# Altium PCB Sensor_Box_CAN_Switch.PCBDOC
Units mil, origin at the board's own origin, x right, y up, seen from the top; angles counter-clockwise.
Board outline 1496.06 x 1407.48 mil, 2 copper layers (Top, Bot), stack 61.855 mil thick; 57 components, 46 nets, 208 pads, 53 vias.
Unrouted connection lines stored in the file: 1.
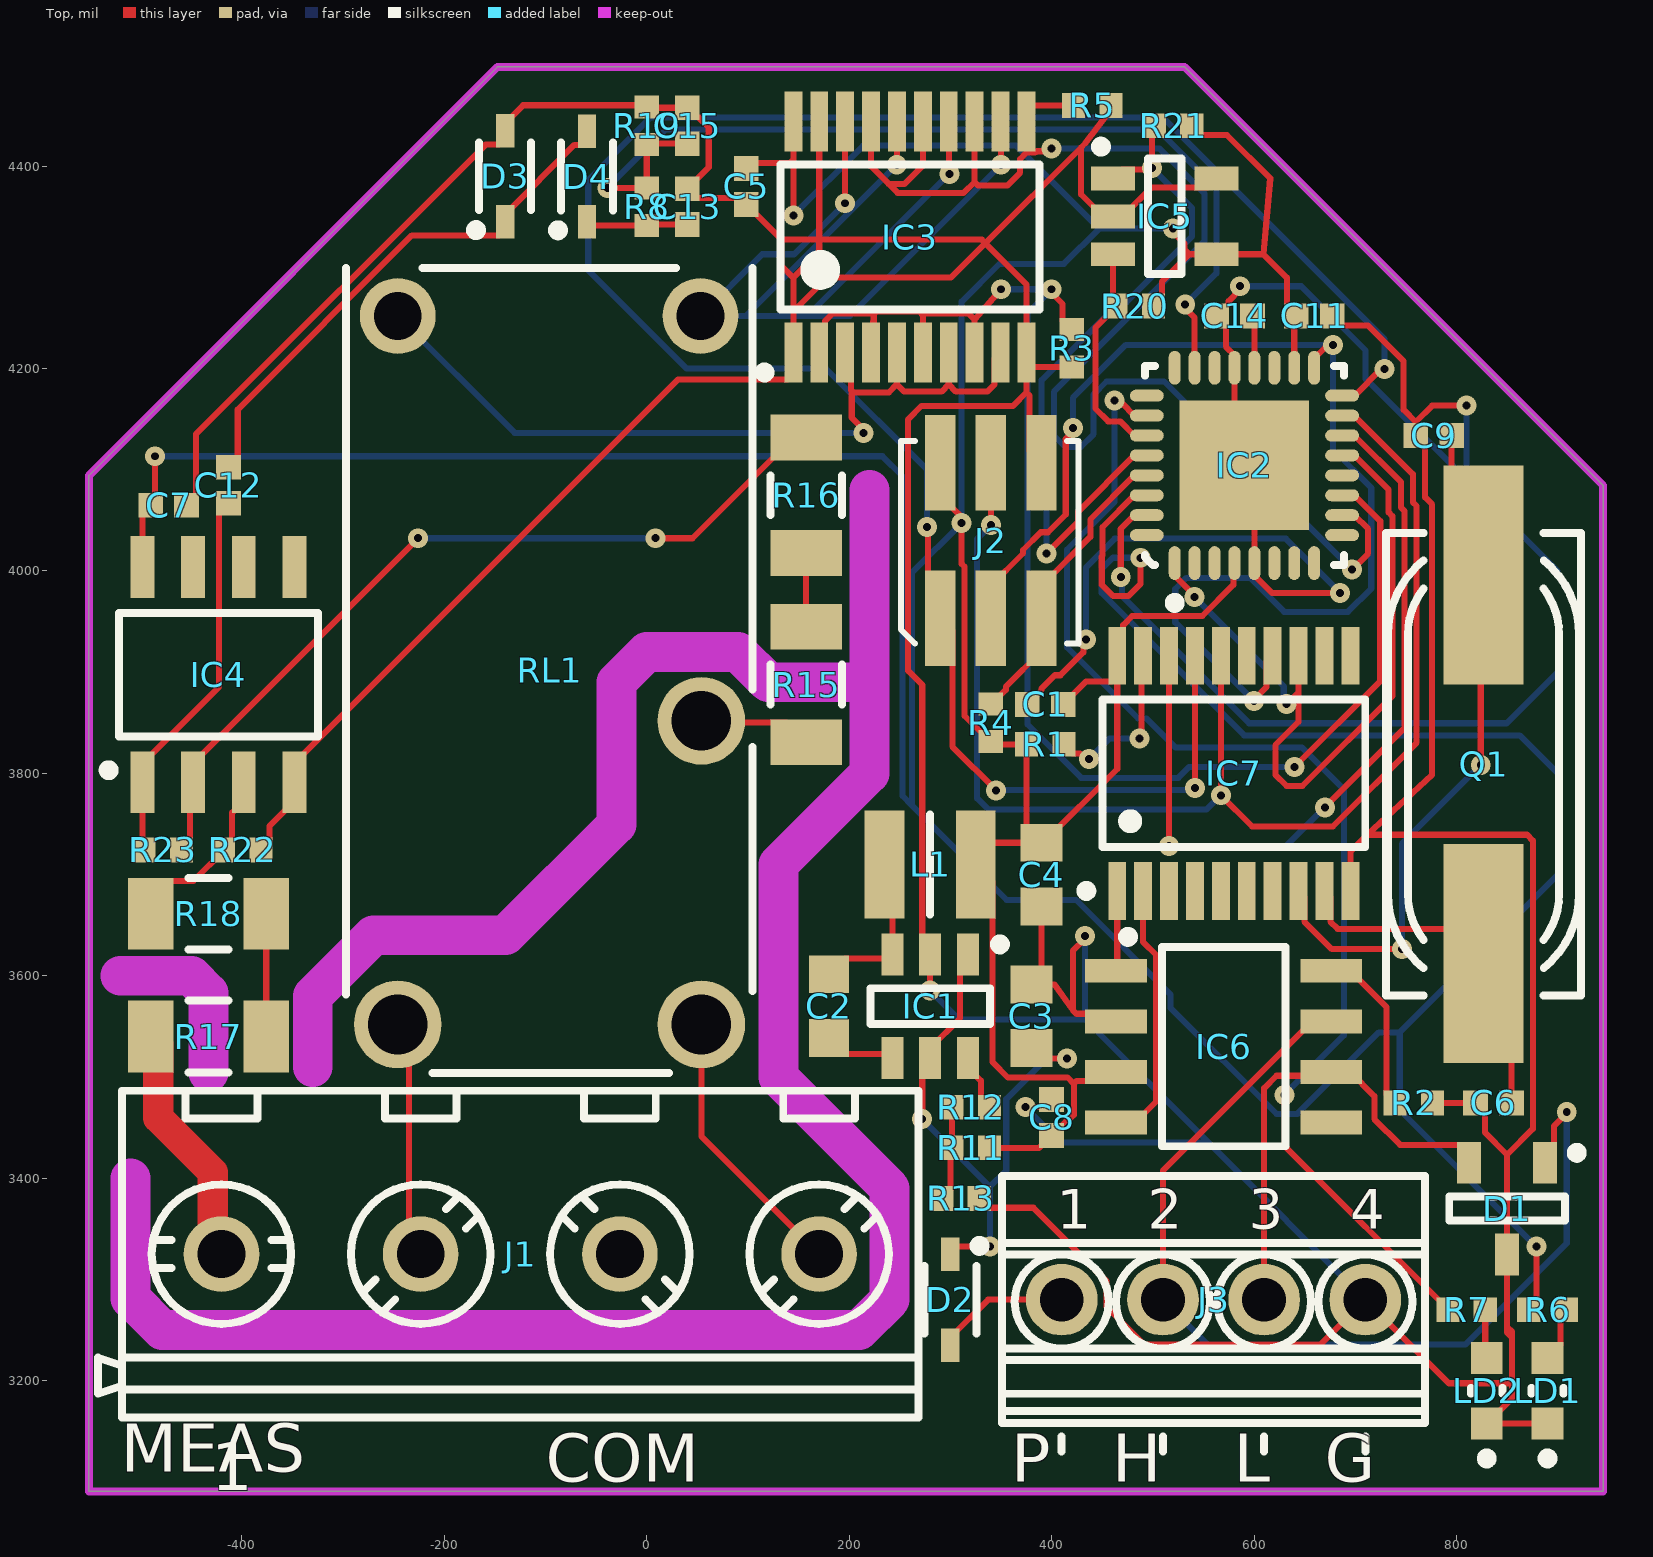
[diagram p0: Top view]
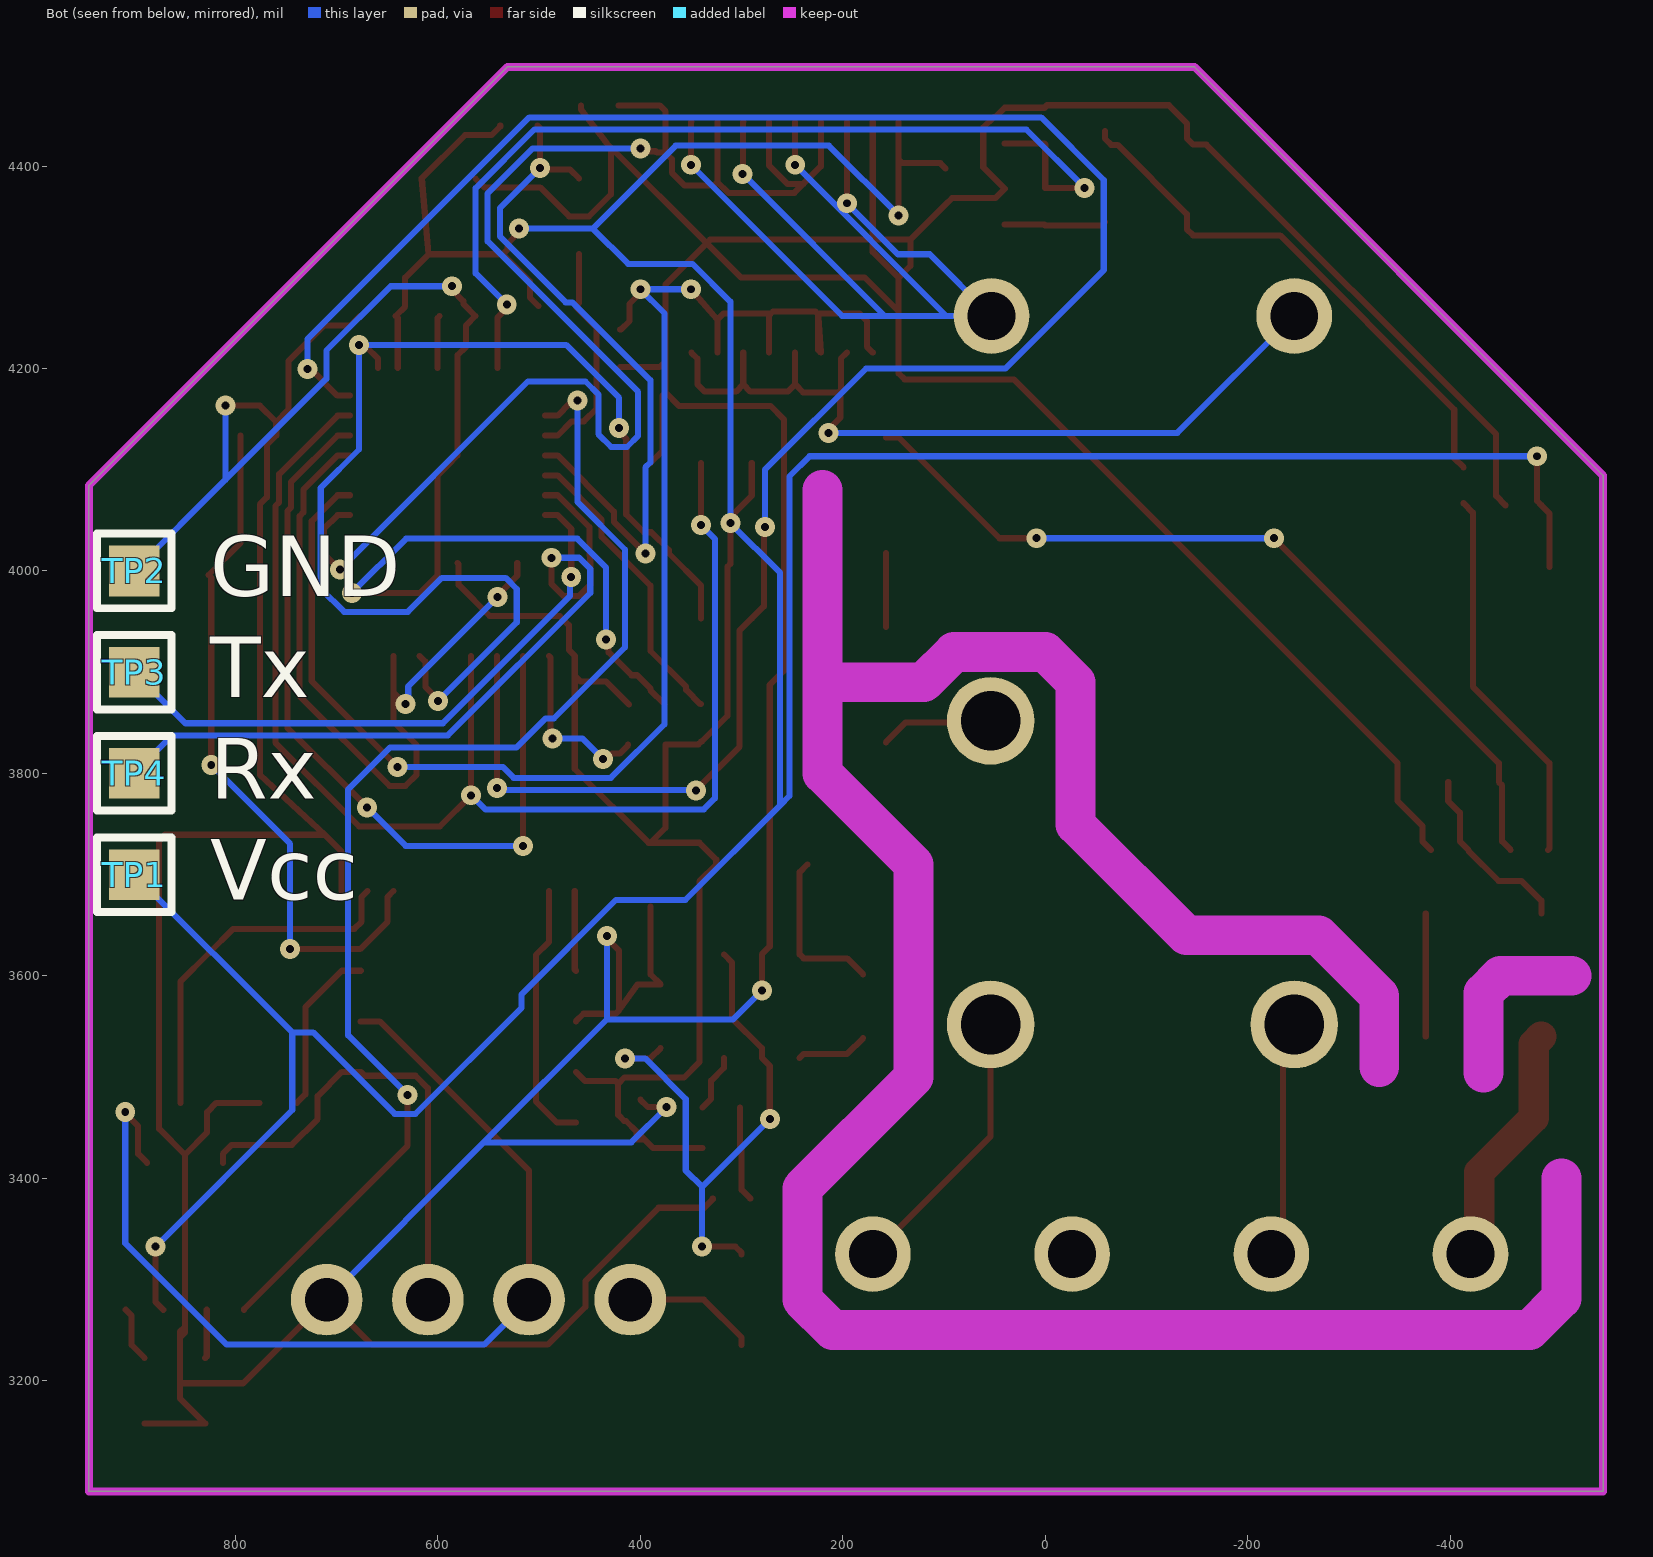
[diagram p1: Bot view, seen from below]
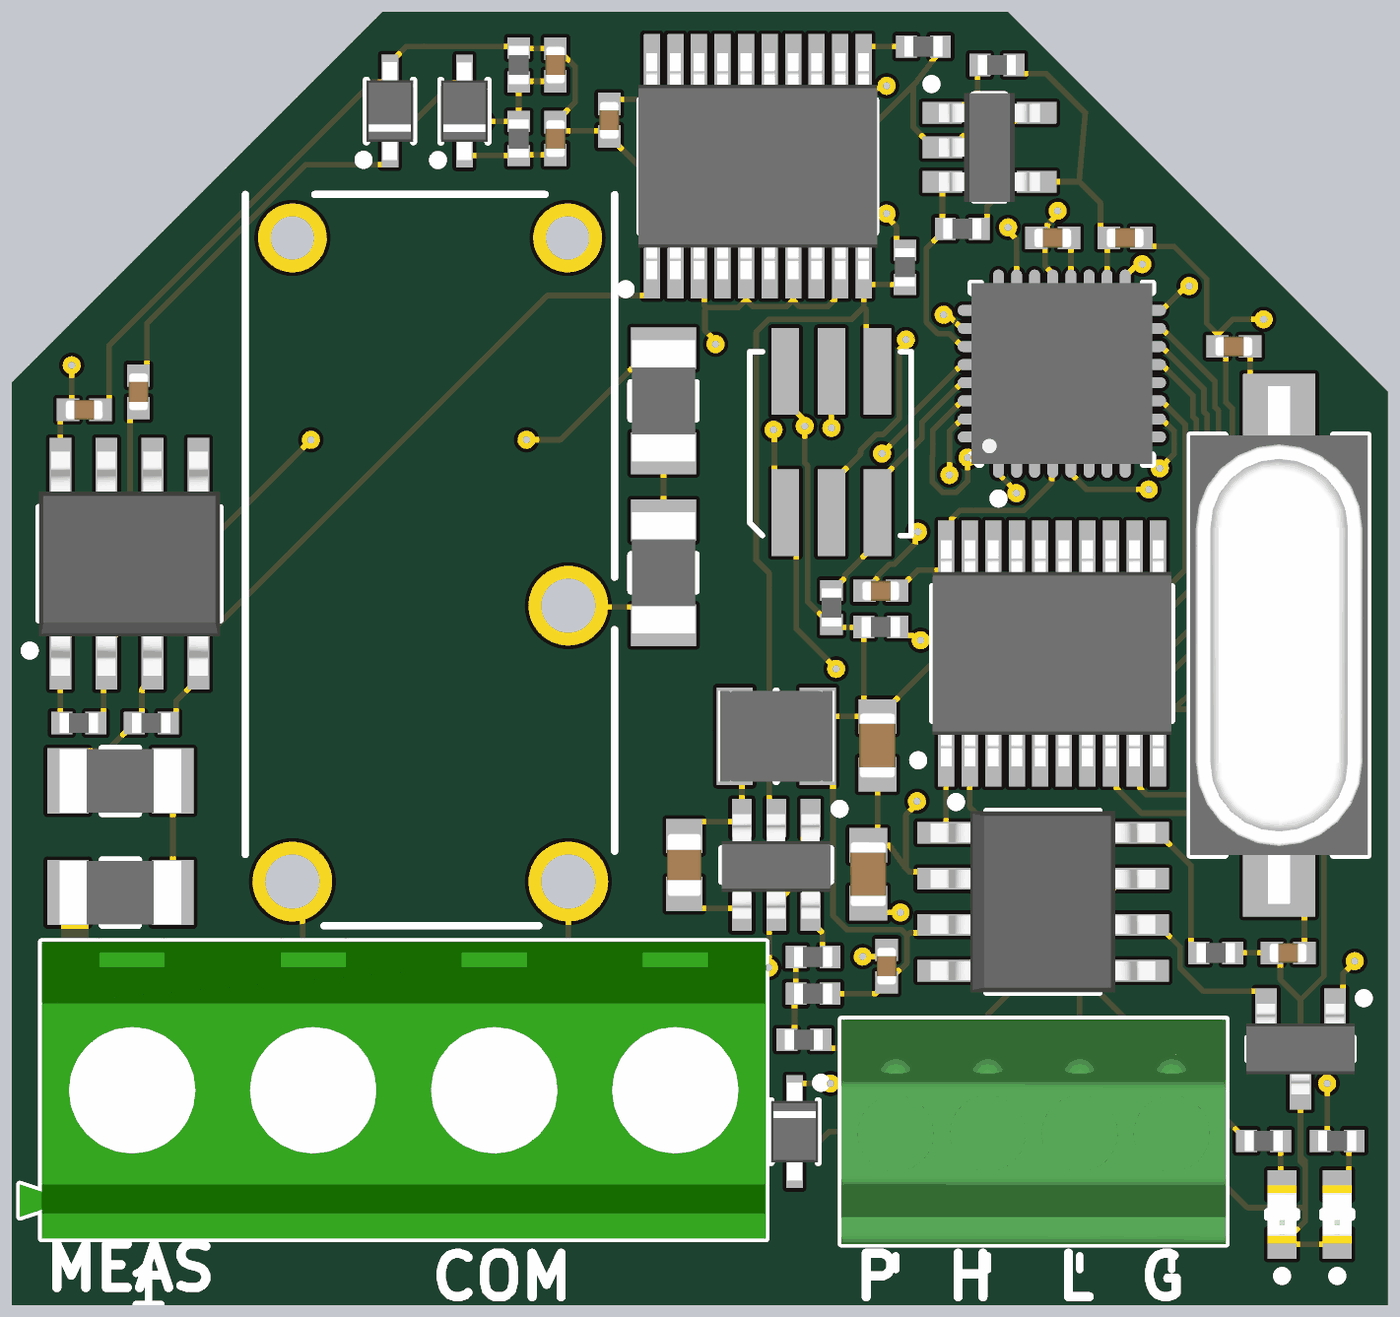
[diagram p2: 3D render of the assembled board from above, using the file's embedded part models]

## Layer stack, top to bottom
TopSolder: solder mask 0.4, Solder Resist, Dk 3.5
Top: signal copper 1.4
Dielectric1: core 59.0551, FR-4, Dk 4.8
Bot: signal copper 1.4
BottomSolder: solder mask 0.4, Solder Resist, Dk 3.5

## Board outline
-551.18,3090.55 -551.18,4094.49 -531.5,4114.17 -147.64,4498.03 531.5,4498.03 944.88,4084.65 944.88,3090.55

## Design rules (kind name [scope] priority, off if disabled: settings)
AcuteAngle [All] p1: minimum=6.00000000000000E+0001 checktracksonly=FALSE
Clearance keepouy [All vs OnLayer('KeepOutLayer')] p1: gap=10 ignorepadtopadclearanceinfootprint=FALSE
Clearance Clearance_poly [(InPolygon)] p2: gap=23.62 ignorepadtopadclearanceinfootprint=FALSE except(0: Arc-Hole Track-Hole SMDPad-Hole THPad-Hole Via-Hole Fill-Hole Poly-Hole Region-Hole Text-Hole)
Clearance [All] p3: gap=6 ignorepadtopadclearanceinfootprint=FALSE except(10: Arc-Hole Track-Hole SMDPad-Hole THPad-Hole Via-Hole)
DiffPairsRouting [All] p1: maxlimit=20 minlimit=15 mostfreqgap=17 toplayer_minwidth=15 toplayer_maxwidth=15 toplayer_prefwidth=15 bottomlayer_minwidth=15 bottomlayer_maxwidth=15 bottomlayer_prefwidth=15 maxuncoupledlength=500
HoleSize [All] p1: absolutevalues=TRUE maxlimit=200 minlimit=1 maxpercent=80.000 minpercent=20.000
MinimumSolderMaskSliver [All] p1: minsoldermaskwidth=0
MinimumSolderMaskSliver SilkscreenOverComponentPads [All] p2: minsoldermaskwidth=10
PlaneClearance [All] p1: clearance=8
PlaneConnect PlaneConnect_pad [(InPadClass('All Pads'))] p1: planeconnectstyle=Relief reliefexpansion=20 reliefentries=4 reliefconductorwidth=10 reliefairgap=10
PlaneConnect [All] p2: planeconnectstyle=Direct reliefexpansion=20 reliefentries=4 reliefconductorwidth=10 reliefairgap=10
PolygonConnect PolygonConnect_pad [(InPadClass('All Pads'))] p1: connectstyle=Relief reliefconductorwidth=10 reliefentries=4 polygonreliefangle="90 Angle" airgapwidth=10
PolygonConnect [All] p2: connectstyle=Direct reliefconductorwidth=10 reliefentries=4 polygonreliefangle="90 Angle" airgapwidth=10
RoomDefinition Sensor_Box_Modbus_Switch [InComponentClass('Sensor_Box_Modbus_Switch')] p1 off: confinementstyle=ConfineIn formatcopy=TRUE lockcomponents=FALSE outline 793.29,1049.2 7988.16,1049.2 7988.16,1984.24 793.29,1984.24
RoutingVias [All] p1: holewidth=7.87 width=19.68 viastyle="Through Hole" minholewidth=7.87 minwidth=19.68 maxholewidth=19.68 maxwidth=39.37
SilkToSilkClearance [All] p1: silktosilkclearance=0
SolderMaskExpansion [All] p1: expansion=4
ViasUnderSMD ViasUnderSMD_allow [InComponent('IC18') or InComponent('IC10') or InComponent('IC13') or InComponent('IC14') or InComponent('IC15')] p1: allowed=TRUE
ViasUnderSMD [All] p2: allowed=FALSE
Width Width_1 [(InDifferentialPairClass('All Differential Pairs'))] p1: maxlimit=8 minlimit=8 preferedwidth=8
Width [All] p2: maxlimit=100 minlimit=6 preferedwidth=6
24 further rules are at their usual default settings.

## Components (designator, comment, footprint, x,y, rotation, side; value= is the part's Value field where it differs from the comment)
C1 "100nF" CAPC1005X55N 393.7,3868.11 r0 top
C2 "1uF" CAPC1608X87N 180,3570 r90 top
C3 "22uF" CAPC1709X100N 380,3560 r270 top
C4 "22uF" CAPC1709X100N 390,3700 r90 top
C5 "1uF" CAPC1005X55N 98.43,4379.92 r270 top
C6 "18pF" CAPC1005X55N 836.61,3474.41 r0 top
C7 "1uF" CAPC1005X55N -472.44,4064.96 r180 top
C8 "100nF" CAPC1005X55N 400,3460 r270 top
C9 "18pF" CAPC1005X55N 777.56,4133.86 r0 top
C11 "100nF" CAPC1005X55N 659.45,4251.97 r180 top
C12 "1uF" CAPC1005X55N -413.39,4084.65 r90 top
C13 "1uF" CAPC1005X55N 40,4360 r90 top
C14 "1uF" CAPC1005X55N 580.71,4251.97 r180 top
C15 "1uF" CAPC1005X55N 40,4440 r90 top
D1 "PESD1CAN-UX" SOT95P237X112-3N 850,3370 r270 top
D2 "1N4148WS" SODFL2512X100N 300,3280 r270 top
D3 "1N4148WS" SODFL2512X100N -140,4390 r90 top
D4 "1N4148WS" SODFL2512X100N -59.06,4389.76 r90 top
IC1 "AP65111A" SOT95P285X110-6N 280,3570 r270 top
IC2 "ATMEGA328PB-MU" QFN50P500X500X100-33N-S325 590.55,4104.33 r90 top
IC3 "SN74HCT244PW" SOP65P640X120-20N 260,4330 r90 top
IC4 "LM358AD" SOIC127P600X175-8N -423.23,3897.64 r90 top
IC5 "24AA16T-I/OT" SOT95P280X145-5N 511.81,4350.39 r0 top
IC6 "MCP2551-I/SN" SOIC127P600X175-8N 570,3530 r0 top
IC7 "MCP2515-I/ST" SOP65P640X110-20N 580,3800 r90 top
J1 "Family" TYCO_282836-4 -125,3325 r0 top
J2 "ZL322-2X3P or PLHTD6S-TR-CV" ZL322-2X3P 340,4030 r0 top
J3 "Family" PHOENIX_1725672 560,3280 r0 top
L1 "6.8uH" IND_WALSIN_WLPN3030 280,3710 r0 top
LD1 "Green" LED_KINGBRIGHT_KPH-1608CGCK 890,3190 r90 top
LD2 "Green" LED_KINGBRIGHT_KPH-1608CGCK 830,3190 r90 top
Q1 "20MHz" XTAL1160X490X430 826.77,3809.06 r90 top
R1 "10k" RESC1005X40N 393.7,3828.74 r0 top
R2 "4k7" RESC1005X40N 757.87,3474.41 r180 top
R3 "10k" RESC1005X40N 420,4220 r90 top
R4 "10k" RESC1005X40N 340,3850 r90 top
R5 "10k" RESC1005X40N 440,4460 r180 top
R6 "10k" RESC1005X40N 890,3270 r0 top
R7 "10k" RESC1005X40N 810,3270 r0 top
R8 "10k" RESC1005X40N 0,4360 r90 top
R11 "68k" RESC1005X40N 320,3430 r0 top
R12 "68k" RESC1005X40N 320,3470 r180 top
R13 "13k" RESC1005X40N 310,3380 r180 top
R15 "1M" RESC3216X65N 157.48,3887.8 r90 top
R16 "1M" RESC3216X65N 157.48,4074.8 r90 top
R17 "1M" RESC3216X65N -433.07,3540 r0 top
R18 "1M" RESC3216X65N -433.07,3661.42 r180 top
R19 "10k" RESC1005X40N 0,4440 r270 top
R20 "1k" RESC1005X40N 482.28,4261.81 r0 top
R21 "1k" RESC1005X40N 520,4440 r0 top
R22 "10k" RESC1005X40N -399.61,3724.41 r0 top
R23 "10k" RESC1005X40N -478.35,3724.41 r0 top
RL1 "REL_TYCO_SCHRACK_PE014F05" REL_TYCO_SCHRACK_PE -246.06,4251.97 r270 top value=5VDC
TP1 "Test Point" TPS127 900,3700 r270 bottom
TP2 "Test Point" TPS127 900,4000 r270 bottom
TP3 "Test Point" TPS127 900,3900 r270 bottom
TP4 "Test Point" TPS127 900,3800 r270 bottom

## Footprints (in the part's own frame and the unit in brackets; to place one, negate y for a bottom-side part, rotate by r counter-clockwise, add the part's x,y. Pads: shape width x height; smd on the part's side, far side on the other; paste and mask are expansions set on the pad)
CAPC1005X55N [mm] "Chip Capacitor, Body 1.0x0.55mm, IPC Medium Density"
  rect 0.62x0.62 smd: 1(-0.45,0) 2(0.45,0)
  body extent -0.52,-0.27 0.53,0.28, height 0.55
CAPC1608X87N [mm] "Chip Capacitor, Body 1.6x0.8mm IPC Medium Density"
  rect 0.95x1 smd: 1(-0.8,0) 2(0.8,0)
  body extent -0.87,-0.47 0.88,0.48, height 0.87
CAPC1709X100N [mm] "Capacitor,non-Polarized, Chip;1.65mm L X 0.85mm W X 1.00mm H, IPC Medium Density"
  rect 0.95x1.05 smd: 1(-0.8,0) 2(0.8,0)
  body extent -0.9,-0.5 0.9,0.5, height 1
IND_WALSIN_WLPN3030 [mm] "Miniature Surface Mount Power Inductors, 3mm L X 3mm W X 1.5mm H"
  rect 1x2.7 smd: 1(-1.145,0) 2(1.145,0)
  silkscreen extent 0,-1.25 0,1.25, body extent -1.6,-1.25 1.6,1.25, height 2.3
LED_KINGBRIGHT_KPH-1608CGCK [mm] "SMT Green LED, Case 0603, Body L 1.6 x W 0.8mm H 0.65mm"
  rect 0.8x0.8 smd: 1(-0.825,0) 2(0.825,0)
  silkscreen extent -1.82,-0.4 0.07,0.4, body extent -0.8,-0.4 0.8,0.4, height 0.65
PHOENIX_1725672 [mm] "Micro PCB Terminal Block, Pitch 2.54mm, 4 Positions, Screw Connection"
  round 1.8 hole 1.1: 1(-3.81,0) 2(-1.27,0) 3(1.27,0) 4(3.81,0)
  silkscreen extent -5.31,-3.81 5.31,3.1, body extent -5.31,-3.1 5.31,3.1, height 8.5
QFN50P500X500X100-33N-S325 [mm] "QFN, (MO-220-VHHD-4) 0.50mm pitch,square; 8 pin X 8 pin, 5mm X 5mm X 1.00mm H body (w/thermal tab 3.25 X 3.25mm),  IPC Medium Density"
  oval 0.85x0.3 smd: 1(-2.45,1.75) 2(-2.45,1.25) 3(-2.45,0.75) 4(-2.45,0.25) 5(-2.45,-0.25) 6(-2.45,-0.75) 7(-2.45,-1.25) 8(-2.45,-1.75) 17(2.45,-1.75) 18(2.45,-1.25) 19(2.45,-0.75) 20(2.45,-0.25) 21(2.45,0.25) 22(2.45,0.75) 23(2.45,1.25) 24(2.45,1.75)
  oval 0.3x0.85 smd: 9(-1.75,-2.45) 10(-1.25,-2.45) 11(-0.75,-2.45) 12(-0.25,-2.45) 13(0.25,-2.45) 14(0.75,-2.45) 15(1.25,-2.45) 16(1.75,-2.45) 25(1.75,2.45) 26(1.25,2.45) 27(0.75,2.45) 28(0.25,2.45) 29(-0.25,2.45) 30(-0.75,2.45) 31(-1.25,2.45) 32(-1.75,2.45)
  rect 3.25x3.25 smd: 33(0,0)
  silkscreen extent -3.57,-2.5 2.5,2.5, body extent -2.5,-2.5 2.5,2.5, height 1
REL_TYCO_SCHRACK_PE [mm] "5 Leads, Row Spacing 7.62 mm; Body 20mm x 10mm, TYCO PCH Series"
  round 2.2 hole 1.5: 11(10.16,7.62) 12(17.78,0) 14(17.78,7.62)
  round 1.9 hole 1.2: A1(0,7.6) A2(0,0)
  silkscreen extent -1.2,-1.3 19,8.9, body extent -1.2,-1.3 19,8.9, height 10
RESC1005X40N [mm] "Chip Resistor, EIA 0402, Metric 1005, Body 1.0x0.5mm, IPC Medium Density"
  rect 0.58x0.62 smd: 1(-0.47,0) 2(0.47,0)
  body extent -0.52,-0.27 0.53,0.28, height 0.4
RESC3216X65N [mm] "Chip Resistor, EIA 1206, Metric 3216, Body 3.2x1.6mm, IPC Medium Density"
  rect 1.15x1.8 smd: 1(-1.45,0) 2(1.45,0)
  silkscreen extent -0.5,-0.9 0.5,0.9, body extent -1.67,-0.87 1.68,0.88, height 0.65
SODFL2512X100N [mm] "SODFL Diode; 1.70mm W X 1.25mm L X 1.00mm H body, IPC Medium Density"
  rect 0.84x0.46 smd: 1(-1.14,0) 2(1.14,0)
  silkscreen extent -1.47,-0.65 0.85,0.86, body extent -1.35,-0.65 1.35,0.65, height 1
SOIC127P600X175-8N [mm] "SOIC 8, Pitch 1.27mm - Body 4x5mm, IPC Medium Density"
  rect 1.55x0.6 smd: 1(-2.7,1.905) 2(-2.7,0.635) 3(-2.7,-0.635) 4(-2.7,-1.905) 5(2.7,-1.905) 6(2.7,-0.635) 7(2.7,0.635) 8(2.7,1.905)
  silkscreen extent -2.52,-2.5 1.55,2.88, body extent -3.1,-2.5 3.1,2.5, height 1.75
SOP65P640X110-20N [mm] "SOP, 20-Leads, Body 6.6x4.5mm (max), Pitch 0.65mm, IPC Medium Density"
  rect 1.45x0.45 smd: 1(-2.95,2.925) 2(-2.95,2.275) 3(-2.95,1.625) 4(-2.95,0.975) 5(-2.95,0.325) 6(-2.95,-0.325) 7(-2.95,-0.975) 8(-2.95,-1.625) 9(-2.95,-2.275) 10(-2.95,-2.925) 11(2.95,-2.925) 12(2.95,-2.275) 13(2.95,-1.625) 14(2.95,-0.975) 15(2.95,-0.325) 16(2.95,0.325) 17(2.95,0.975) 18(2.95,1.625) 19(2.95,2.275) 20(2.95,2.925)
  silkscreen extent -3.07,-3.3 1.85,3.82, body extent -3.12,-3.3 3.12,3.3, height 1.19
SOP65P640X120-20N [mm] "SOP, 20-Leads, Body 6.5x4.4mm, Pitch 0.65mm, IPC Medium Density"
  rect 1.5x0.45 smd: 1(-2.9,2.925) 2(-2.9,2.275) 3(-2.9,1.625) 4(-2.9,0.975) 5(-2.9,0.325) 6(-2.9,-0.325) 7(-2.9,-0.975) 8(-2.9,-1.625) 9(-2.9,-2.275) 10(-2.9,-2.925) 11(2.9,-2.925) 12(2.9,-2.275) 13(2.9,-1.625) 14(2.9,-0.975) 15(2.9,-0.325) 16(2.9,0.325) 17(2.9,0.975) 18(2.9,1.625) 19(2.9,2.275) 20(2.9,2.925)
  silkscreen extent -3.52,-3.25 1.82,3.77, body extent -3.12,-3.3 3.12,3.3, height 1.2
SOT95P237X112-3N [mm] "SOT, 0.95mm, pitch; 3 pin,1.30mm W X 2.92mm L X 1.12mm H body, IPC Medium Density"
  rect 1.05x0.6 smd: 1(-1.15,0.95) 2(-1.15,-0.95) 3(1.15,0)
  silkscreen extent -1.52,-1.45 0.3,1.88, body extent -1.25,-1.5 1.25,1.5, height 1.1
SOT95P280X145-5N [mm] "SOT, 0.95mm pitch; 5 pin, 1.60mm W X 2.90mm L X 1.45mm H body, IPC Medium Density"
  rect 1.1x0.6 smd: 1(-1.3,0.95) 2(-1.3,0) 3(-1.3,-0.95) 4(1.3,-0.95) 5(1.3,0.95)
  silkscreen extent -1.72,-1.45 0.43,1.87, body extent -1.4,-1.5 1.4,1.5, height 1.45
SOT95P285X110-6N [mm] "SOT, 0.95mm, pitch; 6 pin,1.625mm W X 3.025mm L X 1.10mm H body, IPC Medium Density"
  rect 1.05x0.55 smd: 1(-1.3,0.95) 2(-1.3,0) 3(-1.3,-0.95) 4(1.3,-0.95) 5(1.3,0) 6(1.3,0.95)
  silkscreen extent -1.67,-1.5 0.45,1.88, body extent -1.4,-1.5 1.48,1.5, height 1.1
TPS127 [mil] "1.27 x  1.27mm SMD Test Point Area"
  rect 50x50 smd paste-50: 1(0,0)
  silkscreen extent -37,-37 37,37
TYCO_282836-4 [mm] "15.5A, 300V, Terminal Block, Pitch 5mm, 4 Positions, Screw Connection"
  round 1.9 hole 1.2: 1(-7.5,0) 2(-2.5,0) 3(2.5,0) 4(7.5,0)
  silkscreen extent -10.6,-4.1 10,4.1, body extent -10.6,-4.1 10,4.1, height 10
XTAL1160X490X430 [mm] "HC49/4H SMX Case, SMD Cristal, Body 11.6x4.9mm"
  rect 5.5x2 smd: 1(-4.75,0) 2(4.75,0)
  silkscreen extent -5.8,-2.45 5.8,2.45, body extent -7.15,-2.45 7.15,2.45, height 4.3
ZL322-2X3P [mm] "SMT 1.27 mm dual goldpin"
  rect 0.76x2.4 smd: 1(-1.27,-1.95) 2(-1.27,1.95) 3(0,-1.95) 4(0,1.95) 5(1.27,-1.95) 6(1.27,1.95)
  silkscreen extent -2.25,-2.59 2.21,2.49, body extent -2.05,-2.15 2.03,2.15, height 4.5

## Part data
C1 C8 C11: library part CC0402_100NF_16V_10%_X5R, "Non-polarised capacitor", Case=0402, Manufacturer=GENERIC, Manufacturer1 ComponentHeight=0.55mm, Manufacturer1 Example=MURATA, Manufacturer1 Part Number=GRM155R61C104KA88D, Tolerance=±10%, Voltage=16V, Author="CERN DEM JLC", Component Type=Standard, CreateDate=10.12.2013, HelpURL=\\cern.ch\dfs\Applications\Altium\Datasheets\CC0402_X5R_MURATA_GRM.pdf, LatestRevisionDate=10.12.2013, Manufacturer Part Number=CC0402_100NF_16V_10%_X5R, Mounted=Yes, Part Description="SMD Multilayer Chip Ceramic Capacitor", Part Number=CC0402_100NF_16V_10%_X5R, Pin Count=2, Sense=No, SMD=Yes, Socket=No, Status=None, TC=X5R
C2: library part CC0603_1UF_16V_10%_X7R, "Non-polarised capacitor", Case=0603, Manufacturer=GENERIC, Manufacturer1 ComponentHeight=0.9mm, Manufacturer1 Example="YAGEO PHYCOMP", Manufacturer1 Part Number=223878615663, Manufacturer Part Number=CC0603_1uF_16V_10%_X7R, Tolerance=±10%, Voltage=16V, Author="CERN DEM JLC", Component Type=Standard, CreateDate=03.12.2007, HelpURL=\\cern.ch\dfs\Applications\Altium\Datasheets\CC0603_X7R_PHYCOMP.pdf, LatestRevisionDate=17.04.2015, Mounted=Yes, Part Description="SMD Multilayer Chip Ceramic Capacitor", Part Number=CC0603_1UF_16V_10%_X7R, Pin Count=2, Sense=No, SMD=Yes, Socket=No, Status=None, TC=X7R
C3 C4: library part CC0603_22UF_6.3V_20%_X5R, "Non-polarised capacitor", Case=0603, Manufacturer=GENERIC, Manufacturer1 ComponentHeight=1mm, Manufacturer1 Example=TDK, Manufacturer1 Part Number=C1608X5R0J226M080AC, Tolerance=±20%, Voltage=6.3V, Author="CERN DEM JLC", Component Type=Standard, CreateDate=16.12.2013, HelpURL=\\cern.ch\dfs\Applications\Altium\Datasheets\CC0603_X5R_TDK_C.pdf, LatestRevisionDate=13.09.2016, Manufacturer Part Number=CC0603_22UF_6.3V_20%_X5R, Mounted=Yes, Part Description="SMD Multilayer Chip Ceramic Capacitor", Part Number=CC0603_22UF_6.3V_20%_X5R, Pin Count=2, Sense=No, SMD=Yes, Socket=No, Status=None, TC=X5R
C5 C7 C12 C13 C14 C15: library part CC0402_1UF_16V_10%_X5R, "Non-polarised capacitor", Case=0402, Manufacturer=GENERIC, Manufacturer1 ComponentHeight=0.55mm, Manufacturer1 Example=TDK, Manufacturer1 Part Number=C1005X5R1C105KT, Tolerance=±10%, Voltage=16V, Author="CERN DEM JLC", Component Type=Standard, CreateDate=25.10.2012, HelpURL=\\cern.ch\dfs\Applications\Altium\Datasheets\CC0402_X5R_TDK_C.pdf, LatestRevisionDate=25.10.2012, Manufacturer Part Number=CC0402_1UF_16V_10%_X5R, Mounted=Yes, Part Description="SMD Multilayer Chip Ceramic Capacitor", Part Number=CC0402_1UF_16V_10%_X5R, Pin Count=2, Sense=No, SMD=Yes, Socket=No, Status=Preferred, TC=X5R
C6 C9: library part CC0402_18PF_50V_5%_C0G, "Non-polarised capacitor", Case=0402, Manufacturer=GENERIC, Manufacturer1 ComponentHeight=0.55mm, Manufacturer1 Example=KEMET, Manufacturer1 Part Number=C0402C180J5GACTU, Tolerance=±5%, Voltage=50V, Author="CERN DEM JLC", Component Type=Standard, CreateDate=04.10.2016, HelpURL="\\cern.ch\dfs\Applications\Altium\Datasheets\CC0805_C0G_KEMET_(Commercial Grade).pdf", LatestRevisionDate=04.10.2016, Manufacturer Part Number=CC0402_18PF_50V_5%_C0G, Mounted=Yes, Part Description="SMD Multilayer Chip Ceramic Capacitor", Part Number=CC0402_18PF_50V_5%_C0G, Pin Count=2, Sense=No, SMD=Yes, Socket=No, Status=Preferred, TC=C0G/NP0
D1: "TVS Diode for CAN", Case=SOT-23, Manufacturer=Nexperia, Power=400W, Voltage=24V, Author="CERN DEM JLC", Bonding=No, ComponentHeight=1.12mm, Component Type=Standard, CreateDate=03.09.2014, Device=PESD1CAN-UX, HelpURL=\\cern.ch\dfs\Applications\Altium\Datasheets\SM712.TCT.pdf, LatestRevisionDate=13.01.2015, Manufacturer Part Number=PESD1CAN-UX, Mounted=Yes, PackageDescription="SOT, 0.95mm, pitch; 3 pin,1.30mm W X 2.92mm L X 1.12mm H body, IPC Medium Density", Part Description="TVS Diode for CAN", Part Number=PESD1CAN-UX, Pin Count=3, PressFit=No, Sense=No, SMD=Yes, Socket=No
D2 D3 D4: "Diode", Case=SOD-323F, Manufacturer="FAIRCHILD SEMICONDUCTOR", Power=150mA, Voltage=75V, Author="CERN DEM JLC", Bonding=No, ComponentHeight=1mm, Component Type=Standard, CreateDate=12.05.2011, Device=1N4148WS, HelpURL=\\cern.ch\dfs\Applications\Altium\Datasheets\1N4148WS.pdf, LatestRevisionDate=12.05.2011, Manufacturer Part Number=1N4148WS, Mounted=Yes, PackageDescription="SODFL Diode; 1.70mm W X 1.25mm L X 1.00mm H body, IPC Medium Density", Part Description="Small Signal Diodes", Part Number=1N4148WS, Pin Count=2, PressFit=No, Sense=No, SMD=Yes, Socket=No
IC1: "LIGHT LOAD IMPROVED 1.5A SYNCH DC/DC BUCK CONVERTER", Case=SOT26, Manufacturer="DIODES INCORPORATED", Author=GK, Bonding=No, ComponentHeight=1.45mm, Component Type=Standard, CreateDate=10.07.2015, Device=AP65111A, HelpURL=\\cern.ch\dfs\Applications\Altium\Datasheets\AP133-WG-7.pdf, LatestRevisionDate=10.07.2015, Manufacturer Part Number=AP65111A, Mounted=Yes, PackageDescription="SOT23, 0.95mm pitch; 6 pin, 1.6mm W X 3.0mm L X 1.45mm H body, IPC Medium Density", Part Description="LIGHT LOAD IMPROVED 1.5A SYNCH DC/DC BUCK CONVERTER", Part Number=AP65111A, Pin Count=5, PressFit=No, Sense=No, SMD=Yes, Socket=No
IC2: "8-bit AVR 20MHz Microcontroller With 32K Bytes In-System  Programmable  Flash", Case=QFN32, Manufacturer=ATMEL, Author=GK, Bonding=No, ComponentHeight=1mm, Component Type=Standard, CreateDate=2011-02-08, Device=ATMEGA328PB-MU, HelpURL=\\cern.ch\dfs\Applications\Altium\Datasheets\ATMEGA328P-MU.pdf, LatestRevisionDate=2014-07-02, Manufacturer Part Number=ATMEGA328PB-MU, Mounted=Yes, PackageDescription="QFN, (MO-220-VHHD-2) 0.50mm pitch,square; 8 pin X 8 pin, 5mm X 5mm X 1.00mm H body (w/thermal tab 3.25 X 3.25mm),  IPC Medium Density", Part Description="8-bit AVR Microcontroller, 32KB Flash, 1KB EEPROM, 2KB SRAM, 32-pin MLF, Industrial Grade (-40°C to 85°C)", Part Number=ATMEGA328PB-MU, Pin Count=33, PressFit=No, Sense=No, SMD=Yes, Socket=No
IC3: "Octal Buffer/Driver with 3-State Ouputs", Case=TSSOP20, Manufacturer="TEXAS INSTRUMENTS", Author="CERN DEM JLC", Bonding=No, ComponentHeight=1.2mm, Component Type=Standard, CreateDate=11.10.2011, Device=SN74HCT244PW, HelpURL=\\cern.ch\dfs\Applications\Altium\Datasheets\SN74HCT244PW.pdf, LatestRevisionDate=11.10.2011, Manufacturer Part Number=SN74HCT244PW, Mounted=Yes, PackageDescription="SOP, 20-Leads, Body 6.5x4.4mm, Pitch 0.65mm, IPC Medium Density", Part Description="Octal Buffer And Line Driver with 3-State Ouputs", Part Number=SN74HCT244PW, Pin Count=20, PressFit=No, Sense=No, SMD=Yes, Socket=No
IC4: "Dual Operational Amplifier", Case=SOIC8, Manufacturer="TEXAS INSTRUMENTS", Author="CERN DEM JLC", Bonding=No, ComponentHeight=1.75mm, Component Type=Standard, CreateDate=02.12.2008, Device=LM358AD, HelpURL=\\cern.ch\dfs\Applications\Altium\Datasheets\LM358AD.pdf, LatestRevisionDate=13.04.2010, Manufacturer Part Number=LM358AD, Mounted=Yes, PackageDescription="SOIC 8, Pitch 1.27mm - Body 4x5mm, IPC Medium Density", Part Description="Dual Operational Amplifier", Part Number=LM358AD, Pin Count=8, PressFit=No, Sense=No, SMD=Yes, Socket=No
IC5: "1.7V-5.5V, 2K I2C Serial EEPROM With EUI-48 Node Identity", Case=SOT23-5, Manufacturer="MICROCHIP TECHNOLOGY", Author=GK, Bonding=No, ComponentHeight=1.45mm, Component Type=Standard, CreateDate=31.03.2016, Device=24AA16T-I/OT, HelpURL=\\cern.ch\dfs\Applications\Altium\Datasheets\24AA02E48T-I-OT.pdf, LatestRevisionDate=31.03.2016, Manufacturer Part Number=24AA16T-I/OT, Mounted=Yes, PackageDescription="SOT, 0.95mm pitch; 5 pin, 1.60mm W X 2.90mm L X 1.45mm H body, IPC Medium Density", Part Description="1.7V-5.5V, 16K I2C Serial EEPROM", Part Number=24AA16T-I/OT, Pin Count=5, PressFit=No, Sense=No, SMD=Yes, Socket=No
IC6: "High-Speed CAN Transceiver, 8-Pin SOIC, Industrial Temperature", Case=SOIC8, Manufacturer="MICROCHIP TECHNOLOGY", Author=GK, Bonding=No, ComponentHeight=1.75mm, Component Type=Standard, CreateDate=07.09.2016, Device=MCP2551-I/SN, LatestRevisionDate=07.09.2016, Manufacturer Part Number=MCP2551-I/SN, Mounted=Yes, PackageDescription="SOIC 8, Pitch 1.27mm - Body 4x5mm, IPC Medium Density", Part Description="High-Speed CAN Transceiver", Part Number=MCP2551-I/SN, Pin Count=8, PressFit=No, Sense=No, SMD=Yes, Socket=No
IC7: library part IFC_MCP2515_TSSOP, "CAN Controller With SPI nterface", Case=TSSOP20, Manufacturer=Microchip, Manufacturer Part Number=MCP2515T-I/ST, Component Type=Standard, Device=MCP2515, Mounted=Yes, PackageDescription="TSSOP 20, Pitch 0.65mm - Body 4.5x6.5mm, IPC Medium Density", Part Description="Stand-Alone CAN Controller with SPI Interface", Part Number=MCP2515T-I/ST, Pin Count=20, SMD=Yes
J1: library part TYCO_282836-4, "Terminal Block, 4 Positions, Screw Connection", Manufacturer="TYCO ELECTRONICS", Manufacturer Part Number=282836-4, Author="CERN DEM JLC", ComponentHeight=10mm, Component Type=Standard, CreateDate=10.11.2014, HelpURL=\\cern.ch\dfs\Applications\Altium\Datasheets\TYCO_282836-4.pdf, LatestRevisionDate=10.11.2014, Mounted=Yes, Part Description="15.5A, 300V, Terminal Block, Pitch 5mm, 4 Positions, Screw Connection", Part Number=TYCO_282836-4, Pin Count=4, PressFit=No, Sense=No, SMD=No, Socket=No, Status=None
J2: library part "CON_2x3 1.27 SMT Male", "1.27 mm dual row goldpin (Maritex)"
J3: library part PHOENIX_1725672, "Terminal Block, 4 Positions, Screw Connection", Manufacturer="PHOENIX CONTACT", Manufacturer Part Number="1725672 (MPT 0,5/4-2,54)", Author="CERN DEM JMW", ComponentHeight=8.5mm, Component Type=Standard, CreateDate=07.11.2008, HelpURL=\\cern.ch\dfs\Applications\Altium\Datasheets\PHOENIX_1725672.pdf, LatestRevisionDate=26.04.2010, Mounted=Yes, Part Description="6A, 63V, Terminal Block, Pitch 2.54mm, 4 Positions, Screw Connection", Part Number=PHOENIX_1725672, Pin Count=4, PressFit=No, Sense=No, SMD=No, Socket=No, Status=None
L1: "6,8uH; 900mA; 0,211?; 3x3x1,5mm", Manufacturer=WALSIN, Manufacturer Part Number=WLPN303015M6R8PB, Part Number=IND_6.8UH_20%_WALSIN_WLPN303015M6R8PB, Power=900mA, Resistance=0.21R, Tolerance=±20%, Author=GK, ComponentHeight=1.5, Component Type=Standard, CreateDate=11.07.2016, HelpURL=\\cern.ch\dfs\Applications\Altium\Datasheets\IND_MURATA-PS_8200.pdf, LatestRevisionDate=11.07.2016, Mounted=Yes, Part Description="Miniature Surface Mount Power Inductor (8200 Series)", Pin Count=2, Sense=No, SMD=Yes, Socket=No, Status=None
LD1 LD2: library part LED_KINGBRIGHT_KPH-1608CGCK, "LED Green 1C 2A", Manufacturer=KINGBRIGHT, Manufacturer Part Number=KPH-1608CGCK, Author="CERN DEM JLC", Bonding=No, Color=Green, ComponentHeight=0.65mm, Component Type=Standard, CreateDate=03.07.2017, HelpURL=\\cern.ch\dfs\Applications\Altium\Datasheets\LED_KINGBRIGHT_KPH-1608CGCK.pdf, LatestRevisionDate=03.07.2017, Mounted=Yes, PackageDescription="SMT Green LED, Case 0603, Body L 1.6 x W 0.8mm H 0.65mm", Part Description="SMD Green LED, Case 1.6mmX0.8mm(0603), 0.65mm Thickness", Part Number=LED_KINGBRIGHT_KPH-1608CGCK, Pin Count=2, PressFit=No, Sense=No, SMD=Yes, Socket=No
Q1: "Quartz Crystal 20MHz, 30ppm, 20pF", Manufacturer="SR PASSIVES", Manufacturer Part Number=20M-49SMD-SR, Part Number="SR PASSIVES 20M-49SMD-SR", Author=GK, Bonding=No, ComponentHeight=4.3mm, Component Type=Standard, CreateDate=19.04.2012, HelpURL=\\cern.ch\dfs\Applications\Altium\Datasheets\XTAL_IQD_LFXTAL003166.pdf, LatestRevisionDate=07.11.2016, Mounted=Yes, PackageDescription="HC49/4H SMX Case, SMD Cristal, Body 11.6x4.9mm", Part Description="Tolerance:± 30ppm, Stability:± 50ppm, -10°C to +60°C, 20pF, Surface Mount Quartz Crystal, HC49/4HSMX Series", Pin Count=2, PressFit=No, Sense=No, SMD=Yes, Socket=No
R1 R3 R4 R5 R6 R7 R8 R19 R22 R23: library part R0402_10K_1%_0.0625W_100PPM, "Resistor - 1%", Case=0402, Manufacturer=GENERIC, Manufacturer1 ComponentHeight=0.4mm, Manufacturer1 Example="YAGEO PHYCOMP", Manufacturer1 Part Number=232270671003L, Power=0.0625W, Tolerance=±1%, Author="CERN DEM JLC", Component Type=Standard, HelpURL=\\cern.ch\dfs\Applications\Altium\Datasheets\R0402_Phycomp_RC0402.pdf, Manufacturer Part Number=R0402_10K_1%_0.0625W_100PPM, Mounted=Yes, Part Description="General Purpose Thick Film Chip Resistor", Part Number=R0402_10K_1%_0.0625W_100PPM, Pin Count=2, SMD=Yes, Socket=No, TC=±100ppm/°C
  R1 R3 R4 R5 R6 R7: CreateDate=03.12.2007, LatestRevisionDate=17.10.2012, PressFit=No, Sense=No, Status="Not Recommended"
  R8 R19 R22 R23: CreateDate=2007-12-03, LatestRevisionDate=2012-10-17, Status="Not recommended", Table="Resistors SMD"
R2: library part R0402_4K7_1%_0.0625W_100PPM, "Resistor - 1%", Case=0402, Manufacturer=GENERIC, Manufacturer1 ComponentHeight=0.4mm, Manufacturer1 Example="YAGEO PHYCOMP", Manufacturer1 Part Number=232270674702L, Power=0.0625W, Tolerance=±1%, Author="CERN DEM JLC", Component Type=Standard, CreateDate=03.12.2007, HelpURL=\\cern.ch\dfs\Applications\Altium\Datasheets\R0402_Phycomp_RC0402.pdf, LatestRevisionDate=17.10.2012, Manufacturer Part Number=R0402_4K7_1%_0.0625W_100PPM, Mounted=Yes, Part Description="General Purpose Thick Film Chip Resistor", Part Number=R0402_4K7_1%_0.0625W_100PPM, Pin Count=2, PressFit=No, Sense=No, SMD=Yes, Socket=No, Status="Not Recommended", TC=±100ppm/°C
R11 R12: library part R0402_68K_1%_0.0625W_100PPM, "Resistor - 1%", Case=0402, Manufacturer=GENERIC, Manufacturer1 ComponentHeight=0.4mm, Manufacturer1 Example="YAGEO PHYCOMP", Manufacturer1 Part Number=232270676803L, Power=0.0625W, Tolerance=±1%, Author="CERN DEM JLC", Component Type=Standard, CreateDate=03.12.2007, HelpURL=\\cern.ch\dfs\Applications\Altium\Datasheets\R0402_Phycomp_RC0402.pdf, LatestRevisionDate=17.10.2012, Manufacturer Part Number=R0402_68K_1%_0.0625W_100PPM, Mounted=Yes, Part Description="General Purpose Thick Film Chip Resistor", Part Number=R0402_68K_1%_0.0625W_100PPM, Pin Count=2, PressFit=No, Sense=No, SMD=Yes, Socket=No, Status="Not Recommended", TC=±100ppm/°C
R13: library part R0402_13K_1%_0.0625W_100PPM, "Resistor - 1%", Case=0402, Manufacturer=GENERIC, Manufacturer1 ComponentHeight=0.4mm, Manufacturer1 Example="YAGEO PHYCOMP", Manufacturer1 Part Number=232270671303L, Power=0.0625W, Tolerance=±1%, Author="CERN DEM JLC", Component Type=Standard, CreateDate=03.12.2007, HelpURL=\\cern.ch\dfs\Applications\Altium\Datasheets\R0402_Phycomp_RC0402.pdf, LatestRevisionDate=17.10.2012, Manufacturer Part Number=R0402_13K_1%_0.0625W_100PPM, Mounted=Yes, Part Description="General Purpose Thick Film Chip Resistor", Part Number=R0402_13K_1%_0.0625W_100PPM, Pin Count=2, PressFit=No, Sense=No, SMD=Yes, Socket=No, Status="Not Recommended", TC=±100ppm/°C
R15 R16 R17 R18: library part R1206_1M_1%_0.25W_100PPM, "Resistor - 1%", Case=1206, Manufacturer=GENERIC, Manufacturer1 ComponentHeight=0.65mm, Manufacturer1 Example="NIC COMPONENT", Manufacturer1 Part Number=NRC12F1004TRF, Power=0.25W, Tolerance=±1%, Author="CERN DEM JLC", Component Type=Standard, CreateDate=03.12.2007, HelpURL=\\cern.ch\dfs\Applications\Altium\Datasheets\R1206_NIC_NRC.pdf, LatestRevisionDate=13.03.2008, Manufacturer Part Number=R1206_1M_1%_0.25W_100PPM, Mounted=Yes, Part Description="General Purpose Thick Film Chip Resistor", Part Number=R1206_1M_1%_0.25W_100PPM, Pin Count=2, PressFit=No, Sense=No, SMD=Yes, Socket=No, Status=Preferred, TC=±100ppm/°C
R20 R21: library part R0402_1K_1%_0.0625W_100PPM, "Resistor - 1%", Case=0402, Manufacturer=GENERIC, Manufacturer1 ComponentHeight=0.4mm, Manufacturer1 Example="YAGEO PHYCOMP", Manufacturer1 Part Number=232270671002L, Power=0.0625W, Tolerance=±1%, Author="CERN DEM JLC", Component Type=Standard, CreateDate=03.12.2007, HelpURL=\\cern.ch\dfs\Applications\Altium\Datasheets\R0402_Phycomp_RC0402.pdf, LatestRevisionDate=17.10.2012, Manufacturer Part Number=R0402_1K_1%_0.0625W_100PPM, Mounted=Yes, Part Description="General Purpose Thick Film Chip Resistor", Part Number=R0402_1K_1%_0.0625W_100PPM, Pin Count=2, PressFit=No, Sense=No, SMD=Yes, Socket=No, Status="Not Recommended", TC=±100ppm/°C
RL1: "PE PCB Relay Form C (1 CO Contact), 1 Coil", Manufacturer="TYCO SCHRACK", Manufacturer Part Number=PE014F05, Author=GK, ComponentHeight=10mm, Component Type=Standard, CreateDate=28.06.2017, HelpURL=\\cern.ch\dfs\Applications\Altium\Datasheets\REL_TYCO_SCHRACK_RT314F05.pdf, LatestRevisionDate=28.06.2017, Mounted=Yes, PackageDescription="5 Leads, Row Spacing 5.12mm; Body 20mm x 10mm, TYCO PE Series", Part Description="5A SPDT Power PCB Relay PE Bistable Series", Part Number=REL_TYCO_SCHRACK_PE014F05, Pin Count=5, PressFit=No, Sense=No, SMD=No, Socket=No, Status=None
TP1 TP2 TP3 TP4: library part SMD_PAD_1.27X1.27MM, Author="CERN DEM JLC", ComponentHeight=0mm, Component Type="Standard (No BOM)", CreateDate=12.01.2008, Family="Test Point", HelpURL=Undefined, LatestRevisionDate=12.01.2008, Mounted=No, PackageDescription="1.27mm x 1.27mm PCB Copper Area (SMD Test Point)", Part Description="1.27mm x 1.27mm PCB Copper Area (SMD Test Point)", Part Number=SMD_PAD_1.27X1.27MM, Pin Count=1, Sense=No, SMD=Yes, Socket=No, Status=None

## Via types
v1: diameter 19.68, hole 7.87, Top to Bot, 53 vias

## Nets (pads, with @x,y where several pads share a name; then routed paths per layer and width w, separated by ;. In a path a pad name is that pad's centre, name@x,y a point inside that pad or via, vN(x,y) a via of type N, cw(c..) or ccw(c..) an arc to the next point about the centre after c; other vN are vias at no path point)
AC_MEAS: C15.1 IC2.23 R8.2 R19.2 | length 966.1
  Top w6: v1(-38.97,4378.5) R8.2 R19.2 0.79,4422.28 C15.1 ; v1(532.03,4263.38) 532.03,4259.67 541.34,4250.37 IC2.23
  Bot w6: v1(-38.97,4378.5) 18.75,4436.22 504.81,4436.22 562.87,4378.15 562.87,4294.22 v1(532.03,4263.38)
CAN_CSn: IC2.14 IC7.18 | length 790.3
  Top w6: v1(516.02,3728.38) IC7.18 ; v1(670.03,3766.38) 748.74,3845.09 748.74,4059.23 745.05,4062.92 745.05,4088.04 699.23,4133.86 IC2.14
  Bot w6: v1(516.02,3728.38) 632.03,3728.38 v1(670.03,3766.38)
CAN_INT: IC2.1 IC2.13 IC7.13 | length 751.6
  Top w6: IC2.1 521.65,3995.47 541.03,3976.1 v1(541.03,3974.38) ; v1(632.03,3868.38) 643.98,3880.32 ; IC7.13 643.98,3880.32 ; IC2.13 699.23,4114.17 733.05,4080.35 733.05,4057.95 736.74,4054.26 736.74,3876.44 647.84,3787.54 632.23,3787.54 621.19,3798.57 621.19,3828.05 643.98,3850.84 643.98,3880.32
  Bot w6: v1(541.03,3974.38) 629.41,3886 629.41,3871 v1(632.03,3868.38)
CAN_MISO: IC2.16 IC7.17 J2.1 | length 2164.3
  Top w6: v1(277.03,4043.38) 278.04,4042.37 278.04,3965.19 J2.1 301.96,3941.27 301.96,3826.45 v1(345.17,3783.24) ; v1(541.61,3785.38) IC7.17 ; IC2.16 699.41,4173.23 725.79,4199.61 v1(729.04,4199.61)
  Bot w6: v1(277.03,4043.38) 277.03,4100.03 177.08,4199.98 39.52,4199.98 -57.81,4297.31 -57.81,4386.31 4.1,4448.22 509.78,4448.22 729.04,4228.96 v1(729.04,4199.61) ; v1(345.17,3783.24) 345.47,3783.54 539.77,3783.54 v1(541.61,3785.38)
CAN_MOSI: IC2.15 IC7.16 J2.4 | length 1327.5
  Top w6: v1(340,4045.38) J2.4 ; IC7.16 v1(567.21,3778.38) 598.05,3747.54 677.84,3747.54 760.74,3830.44 760.74,4064.2 757.05,4067.9 757.05,4095.72 699.23,4153.54 IC2.15
  Bot w6: v1(340,4045.38) 326.33,4031.71 326.33,3775.43 337.37,3764.39 553.22,3764.39 v1(567.21,3778.38)
CAN_SCK: IC2.17 IC7.14 J2.3 | length 1241.2
  Top w6: J2.3 340,3985.51 371.75,4017.26 371.75,4020.74 389.28,4038.27 396.43,4038.27 413.96,4055.8 413.96,4130.6 421.03,4137.67 v1(421.03,4141.38) ; v1(600.03,3871.38) 600.03,3873.03 612.53,3885.53 612.53,3910.28 IC7.14 ; IC2.17 659.45,4210.04 670.17,4220.76 675.41,4220.76 v1(678.03,4223.38)
  Bot w6: v1(421.03,4141.38) 421.03,4171 473.41,4223.38 v1(678.03,4223.38) 678.03,4120.05 715.87,4082.2 715.87,3982.57 692.84,3959.54 629.87,3959.54 596.19,3993.22 533.23,3993.22 522.19,3982.18 522.19,3949.22 v1(600.03,3871.38)
CANH: D1.1 IC6.7 J3.2 | length 1002.5
  Top w6: J3.2 510,3407.4 657.6,3555 IC6.7 ; D1.1 896.21,3424.09 896.21,3451.55 909.03,3464.37 v1(909.03,3465.38)
  Bot w6: J3.2 554.43,3235.57 808.87,3235.57 909.03,3335.73 v1(909.03,3465.38)
CANL: D1.2 IC6.6 J3.3 | length 473.8
  Top w6: J3.3 610,3488.99 622.23,3501.22 672.52,3501.22 IC6.6 695,3505 718.95,3481.05 718.95,3458.48 744.48,3432.95 803.79,3432.95 812.6,3424.13 D1.2
GND: C1.1 C3.1 C4.1 C5.2 C6.1 C7.1 C8.1 C9.1 C11.1 C13.2 C14.2 C15.2 D1.3 D3.2 IC1.2 IC2.5 IC2.21 IC2.33 IC3.1 IC3.10 IC3.19 IC4.4 IC5.2 IC5.5 IC6.2 IC7.10 J2.6 J3.4 LD1.1 LD2.1 R2.1 R3.1 R5.1 R13.1 R19.1 R22.2 TP2.1 | length 8579.7
  Top w6: C7.1 -445.52,4074.16 -445.52,4135.1 -159.28,4421.35 -146.06,4421.35 -140,4427.4 D3.2 -140,4442.36 -122.18,4460.18 -1.68,4460.18 R19.1 0.79,4457.72 C15.2 49.2,4448.51 50.91,4448.51 61.2,4438.22 61.2,4398.92 C13.2 49.2,4368.51 92.12,4368.51 C5.2 133.25,4327.38 ; R22.2 -372.69,3732.83 -372.69,3748.18 -348.23,3772.64 IC4.4 -348.23,3810.04 31.03,4189.3 138.99,4189.3 144.84,4195.16 IC3.1 144.84,4256.38 ; IC3.19 170.43,4327.38 ; IC1.2 272.17,3629.01 272.17,3887.38 258.19,3901.36 258.19,4149.89 271.43,4163.14 361.92,4163.14 375.16,4176.38 ; v1(280.03,3585.38) IC1.2 ; R13.1 328.5,3379.21 336.92,3370.8 382.04,3370.8 454.43,3298.4 454.43,3272.73 491.59,3235.57 665.57,3235.57 J3.4 792.62,3197.38 855.03,3197.38 ; v1(374.03,3470.38) 392.66,3470.38 C8.1 ; C1.1 390.21,3882.34 390.21,3884.04 403.15,3896.98 408.69,3896.98 431.41,3919.71 431.41,3929.76 v1(434.03,3932.38) ; C4.1 390,3601.5 C3.1 403.03,3591.5 421.03,3566 ; J2.6 378.04,4118.73 378.04,4173.5 375.16,4176.38 ; R3.1 381.02,4201.5 IC3.10@375.16,4207.35 ; v1(433.03,3639.38) 433.03,3636.73 421.03,3624.73 421.03,3566 ; R5.1 458.5,4455.85 433.03,4422.38 429.03,4418.38 ; IC6.2 456.22,3562.49 424.55,3562.49 421.03,3566 ; IC5.5 554.18,4378.98 499.06,4378.98 470.47,4350.39 IC5.2 450.79,4350.39 429.03,4372.15 429.03,4418.38 ; v1(586.03,4281.38) 586.03,4277.67 574.93,4266.57 574.93,4263.9 C14.2 572.2,4242.76 572.2,4221.7 580.71,4213.19 IC2.21 580.71,4114.17 IC2.33 600.39,4094.49 IC2.5 600.39,3995.65 617.67,3978.38 v1(685.03,3978.38) ; C11.1 686.37,4242.76 712.54,4242.76 747.88,4207.42 747.88,4159.15 759.84,4147.19 ; IC7.10 695.16,3722.5 712.03,3739.38 ; R2.1 C6.1 828.1,3465.21 828.1,3445.24 850,3423.35 ; v1(810.03,4163.38) 776.03,4163.38 759.84,4147.19 ; LD1.1 LD2.1 855.03,3182.55 855.03,3197.38 ; 133.25,4327.38 133.25,4301.38 144.84,4289.79 ; 133.25,4327.38 170.43,4327.38 ; 144.84,4256.38 178.59,4290.13 300.78,4290.13 334.53,4323.88 ; 144.84,4256.38 144.84,4289.79 ; 144.84,4289.79 170.43,4315.38 170.43,4327.38 ; 170.43,4327.38 331.03,4327.38 334.53,4323.88 ; 334.53,4323.88 375.16,4283.25 IC3.10 IC3.10@375.16,4207.35 ; 334.53,4323.88 429.03,4418.38 ; 375.16,4176.38 IC3.10@375.16,4207.35 ; 712.03,3739.38 776.03,3798.51 776.03,4065.88 769.05,4072.87 769.05,4124.65 C9.1 759.84,4147.19 ; 712.03,3739.38 869.81,3739.38 875.54,3733.65 875.54,3448.88 850,3423.35 ; 850,3253.41 855.03,3248.38 855.03,3242.35 ; 850,3253.41 850,3247.38 855.03,3242.35 ; 850,3253.41 D1.3 850,3423.35 ; 855.03,3197.38 855.03,3242.35
  Bot w6: v1(280.03,3585.38) 308.44,3556.97 433.03,3556.97 ; v1(374.03,3470.38) 409.03,3435.38 554.62,3435.38 ; v1(433.03,3639.38) 433.03,3556.97 ; v1(434.03,3932.38) 434.03,4003.49 462.43,4031.89 631.52,4031.89 v1(685.03,3978.38) ; v1(586.03,4281.38) 646.68,4281.38 710.2,4217.86 710.2,4189.8 810.03,4089.97 ; J3.4 554.62,3435.38 ; v1(810.03,4163.38) 810.03,4089.97 ; TP2.1 810.03,4089.97 ; 433.03,3556.97 554.62,3435.38
NetC2_1: C2.1 IC1.4 | length 70.8
  Top w6: C2.1 195.7,3522.8 238.61,3522.8 IC1.4
NetC2_2: C2.2 IC1.3 L1.1 | length 162.7
  Top w6: C2.2 195.7,3617.2 238.61,3617.2 IC1.3 242.6,3702.33 L1.1
NetC3_2: C3.2 D2.1 IC1.1 IC1.5 | length 587.5
  Top w6: v1(272.03,3458.38) 272.17,3458.52 272.17,3510.99 IC1.5 280,3528.66 309.57,3558.24 309.57,3613.36 IC1.1 ; D2.1 300,3326.32 306.05,3332.38 v1(339.03,3332.38) ; C3.2 390.13,3518.38 v1(415.03,3518.38)
  Bot w6: v1(272.03,3458.38) 339.03,3391.38 ; v1(339.03,3332.38) 339.03,3391.38 ; v1(415.03,3518.38) 395.38,3518.38 355.19,3478.18 355.19,3407.54 339.03,3391.38
NetC6_2: C6.2 IC7.9 Q1.1 | length 356.2
  Top w6: IC7.9 675.43,3678 675.43,3653.46 682.57,3646.31 802.5,3646.31 Q1.1 854.33,3594.49 C6.2
NetC9_2: C9.2 IC7.8 Q1.2 | length 694.2
  Top w6: IC7.8 649.83,3678 649.83,3653.46 676.92,3626.38 v1(746.03,3626.38) ; C9.2 795.28,4027.56 Q1.2 824.03,3993.32 v1(824.03,3808.38)
  Bot w6: v1(746.03,3626.38) 746.03,3730.38 v1(824.03,3808.38)
NetC12_1: C12.1 IC4.1 R23.1 | length 378.2
  Top w6: R23.1 -498.23,3725.79 IC4.1 -498.23,3810.04 -422.59,3885.68 -422.59,4057.73 C12.1
NetC12_2: C12.2 D3.1 D4.2 | length 533.2
  Top w6: C12.2 -404.18,4111.57 -404.18,4159.47 -232.07,4331.58 -146.06,4331.58 -140,4337.64 D3.1 -140,4352.6 -71.49,4421.11 -65.11,4421.11 -59.05,4427.17 D4.2
NetC13_1: C13.1 D4.1 R8.1 | length 100.8
  Top w6: D4.1 -55.67,4341.5 R8.1 0.79,4342.28 C13.1
NetC14_1: C14.1 IC2.20 | length 52
  Top w6: C14.1 600.39,4250 IC2.20
NetIC1_6: IC1.6 R12.1 | length 57.6
  Top w6: IC1.6 317.4,3508.98 330.09,3496.29 330.09,3478.42 R12.1
NetIC2_26: IC2.26 R7.1 | length 1238.7
  Top w6: v1(462.03,4168.38) 464.65,4165.76 469.66,4165.76 481.87,4153.54 IC2.26 ; v1(630.03,3482.38) 630.03,3432.25 791.5,3270.79 R7.1
  Bot w6: v1(462.03,4168.38) 462.03,4068.05 415.19,4021.2 415.19,3924.57 485.38,3854.38 493.68,3854.38 522.52,3825.54 647.52,3825.54 688.87,3784.18 688.87,3541.22 v1(630.03,3482.38)
NetIC3_3: IC3.3 IC3.5 IC3.7 IC3.9 RL1.A2 | length 845.5
  Top w6: IC3.3 201.88,4209.97 201.88,4178.52 204.02,4176.38 239.21,4176.38 247.21,4184.38 ; 202.53,4174.88 202.53,4151.52 214.03,4140.02 v1(214.03,4136.38) ; IC3.5 247.21,4184.38 ; IC3.7 298.39,4184.38 ; IC3.9 343.71,4209.97 343.71,4184.45 336.56,4177.3 305.47,4177.3 298.39,4184.38 ; 247.21,4184.38 254.28,4177.3 291.31,4177.3 298.39,4184.38
  Bot w6: RL1.A2 -130.47,4136.38 v1(214.03,4136.38)
NetIC3_12: IC3.12 IC3.14 IC3.16 IC3.18 RL1.A1 | length 1176.4
  Top w6: v1(196.02,4363.37) IC3.18 ; v1(247.03,4401.38) 247.12,4401.46 247.12,4444.09 IC3.16 ; IC3.14 298.71,4443.85 298.71,4392.7 v1(299.03,4392.38) ; IC3.12 349.8,4443.94 349.8,4401.61 v1(350.03,4401.38)
  Bot w6: 97.62,4251.97 v1(247.03,4401.38) ; v1(196.02,4363.37) 145.6,4312.94 114.12,4312.94 RL1.A1 158.62,4251.97 ; v1(299.03,4392.38) 158.62,4251.97 ; v1(350.03,4401.38) 200.62,4251.97 158.62,4251.97
NetIC4_2: IC4.2 R16.2 R23.2 | length 829.5
  Top w6: R23.2 -451.43,3732.83 -451.43,3788.14 IC4.2 -448.23,3810.04 -225.97,4032.3 v1(-225.97,4032.38) ; v1(8.52,4032.38) 45.17,4032.38 144.68,4131.89 R16.2
  Bot w6: v1(-225.97,4032.38) v1(8.52,4032.38)
NetIC4_3: IC4.3 R18.2 R22.1 | length 181.3
  Top w6: R18.2 -490.16,3674.21 -470.52,3693.85 -447.88,3693.85 -418.11,3723.62 R22.1 -409.69,3732.83 -409.69,3761.17 -398.23,3772.64 IC4.3
NetIC6_1: IC6.1 IC7.1 | length 79.3
  Top w6: IC6.1 464.84,3606.14 IC7.1
NetIC6_4: IC6.4 IC7.2 | length 261.5
  Top w6: IC6.4 482.4,3455 503.21,3475.81 503.21,3620.54 490.43,3633.32 IC7.2
NetIC6_8: IC6.8 R2.2 | length 167.7
  Top w6: IC6.8 695,3605 730.95,3569.05 730.95,3482.83 R2.2
NetIC7_19: IC7.19 R1.2 | length 172.7
  Top w6: R1.2 412.21,3827.95 420.62,3819.54 428.17,3819.54 433.33,3814.38 v1(437.03,3814.38) ; v1(487.03,3834.38) 488.73,3836.08 488.73,3914.44 IC7.19
  Bot w6: v1(437.03,3814.38) 457.03,3834.38 v1(487.03,3834.38)
NetJ1_2: J1.2 RL1.12 | length 236.3
  Top w6: RL1.12 -234.74,3540.65 -234.74,3336.32 J1.2
NetJ1_4: J1.4 RL1.14 | length 275.2
  Top w6: RL1.14 53.94,3441.34 J1.4
NetLD1_2: LD1.2 R6.2 | length 55.2
  Top w6: LD1.2 902.75,3235.23 902.75,3264.24 R6.2
NetLD2_2: LD2.2 R7.2 | length 48.1
  Top w6: R7.2 828.5,3223.98 LD2.2
NetR11_1: R11.1 R12.2 R13.2 | length 94.1
  Top w6: R13.2 299.91,3388.42 299.91,3428.42 R11.1 R12.2
NetR15_2: R15.2 R16.1 | length 72.8
  Top w6: R15.2 R16.1
NetR17_2: R17.2 R18.1 | length 121.4
  Top w6: R17.2 R18.1
P5V0: C1.2 C4.2 C5.1 C7.2 C8.2 C11.2 IC2.4 IC2.18 IC3.20 IC4.8 IC5.4 IC6.3 IC7.20 J2.2 L1.2 R1.1 R4.1 R6.1 R11.2 R20.2 R21.2 TP1.1 | length 5593.8
  Top w6: IC4.8 -498.23,4056.89 C7.2 -485.97,4069.15 v1(-485.97,4113.38) ; C5.1 103.72,4402.94 141.33,4402.94 144.84,4406.45 ; v1(144.84,4351.38) 144.84,4406.45 ; IC3.20 144.84,4406.45 ; J2.2 290,4074.38 290.11,4074.38 308.41,4056.07 v1@308.41,4053.15 ; R11.2 387.72,3430 C8.2@396.03,3438.31 ; C8.2 C8.2@396.03,3438.31 ; C1.2 433.91,3890.6 458.99,3890.6 IC7.20@464.84,3896.46 ; IC6.3 454.89,3496.19 424.88,3496.19 422.03,3493.34 ; R20.2 509.2,4270.23 509.2,4286.17 536.03,4312.99 ; v1(520.03,4338.38) 520.03,4334.67 531.14,4323.57 531.14,4317.89 536.03,4312.99 ; R21.2 538.5,4439.21 546.92,4430.8 573.27,4430.8 616.03,4388.04 609.31,4312.99 ; IC2.4 579.6,4006.76 579.6,3986.3 548.84,3955.54 479.7,3955.54 470.7,3946.54 470.7,3922 IC7.20 464.84,3906.38 IC7.20@464.84,3896.46 ; IC2.18 639.76,4250 C11.2 632.53,4261.17 632.53,4289.77 609.31,4312.99 ; R6.1 879.03,3277.54 v1(879.03,3332.38) ; v1@308.41,4053.15 v1@314.19,4047.38 ; v1@308.41,4053.15 308.41,4050 v1(311.03,4047.38) v1@314.19,4047.38 ; v1@314.19,4047.38 311.03,4044.22 311.03,4007.13 313.96,4004.2 313.96,3856.75 339.21,3831.5 R4.1 342.76,3828.74 R1.1 375.2,3746.3 C4.2 ; C4.2 391.97,3731.5 464.84,3804.37 IC7.20@464.84,3896.46 ; C4.2 341.77,3731.5 325.08,3714.81 L1.2 341.77,3693.31 341.77,3514.64 356.87,3499.54 415.83,3499.54 422.03,3493.34 ; C8.2@396.03,3438.31 403.97,3438.31 403.97,3446.25 414.23,3456.51 415.93,3456.51 422.03,3462.61 422.03,3493.34 ; 536.03,4312.99 IC5.4 609.31,4312.99
  Bot w6: v1(-485.97,4113.38) 232.85,4113.38 252.68,4093.54 252.68,3777.72 262.03,3768.38 ; v1(144.84,4351.38) 213.69,4420.22 365.19,4420.22 447.03,4338.38 ; v1(520.03,4338.38) 447.03,4338.38 ; v1(879.03,3332.38) 744.03,3467.38 744.03,3544.03 ; TP1.1 744.03,3544.03 ; 262.03,3768.38 355.52,3674.89 424.16,3674.89 517.65,3581.41 517.65,3568.12 622.23,3463.54 642.88,3463.54 723.38,3544.03 744.03,3544.03 ; 262.03,3768.38 262.03,3998.38 v1(311.03,4047.38) 311.03,4266.03 348.52,4303.51 412.16,4303.51 447.03,4338.38
P12V0: D2.2 J3.1 | length 133
  Top w6: D2.2 300,3242.6 337.4,3280 J3.1
REL1: IC2.11 IC3.2 IC3.4 IC3.6 IC3.8 R3.2 | length 1532.5
  Top w6: IC3.2 176.29,4221.68 176.29,4247.21 183.44,4254.35 223.64,4254.35 224.32,4253.67 ; IC3.6 272.8,4252.61 ; IC3.8 323.98,4248.38 ; v1(350.03,4278.38) 323.98,4248.38 ; v1(400.03,4278.38) 400.03,4274.67 410.79,4263.91 410.79,4246.92 419.21,4238.5 R3.2 ; v1(640.03,3806.38) 724.74,3891.09 724.74,4049.29 699.23,4074.8 IC2.11 ; 224.32,4253.67 227.06,4256.41 269,4256.41 272.8,4252.61 ; 224.32,4253.67 224.32,4218.53 IC3.4 224.12,4250.78 224.32,4253.67 ; 272.8,4252.61 272.8,4254.35 318,4254.35 323.98,4248.38
  Bot w6: v1(350.03,4278.38) v1(400.03,4278.38) 376.19,4254.54 376.19,3848.57 429.23,3795.54 525.12,3795.54 535.97,3806.38 v1(640.03,3806.38)
REL2: IC2.10 IC3.11 IC3.13 IC3.15 IC3.17 R5.2 | length 1471.6
  Top w6: IC3.17 221.61,4399.8 238.88,4382.53 ; IC3.15 272.8,4400.49 254.83,4382.53 238.88,4382.53 ; IC3.13 323.98,4384.38 ; v1(400.03,4417.38) 397.41,4414.76 385.02,4414.76 383.64,4413.38 375.16,4413.38 ; R5.2 381.02,4460 375.16,4454.14 IC3.11 375.16,4413.38 ; IC2.10 699.23,4055.12 712.74,4041.61 712.74,4017.09 v1(697.03,4001.38) ; 238.88,4382.53 247.87,4373.54 313.13,4373.54 323.98,4384.38 ; 323.98,4384.38 327.49,4380.86 356.16,4380.86 368.87,4393.57 368.87,4407.09 375.16,4413.38
  Bot w6: v1(400.03,4417.38) 506.68,4417.38 550.87,4373.18 550.87,4325.6 402.19,4176.92 402.19,4133.57 413.23,4122.54 428.84,4122.54 441.53,4135.23 441.53,4174.53 454.23,4187.22 511.19,4187.22 v1(697.03,4001.38)
RESETn: IC2.29 J2.5 R4.2 | length 297.4
  Top w6: R4.2 340.79,3868.5 354.78,3882.5 354.78,3885.72 390,3920.94 J2.5 390,3985.51 438.28,4033.79 438.28,4050.89 481.87,4094.49 IC2.29
Rx: IC2.30 TP4.1 | length 779
  Top w6: v1(488.03,4013.05) 488.03,3987.23 476.17,3975.36 460.56,3975.36 449.52,3986.4 449.52,4014.42 450.28,4015.18 450.28,4043.21 481.88,4074.8 IC2.30
  Bot w6: v1(488.03,4013.05) 460.56,4013.05 449.52,4002.01 449.52,3978.27 590.26,3837.54 862.46,3837.54 TP4.1
SCL: IC2.28 IC5.1 R21.1 | length 695.7
  Top w6: v1(395.03,4017.38) 426.28,4048.63 426.28,4058.58 481.88,4114.17 IC2.28 ; IC5.1 469.44,4396.61 497.26,4396.61 v1(499.03,4398.38) ; v1@499.26,4398.15 v1(499.03,4398.38) ; R21.1 499.03,4437.54 v1(499.03,4398.38)
  Bot w6: v1(395.03,4017.38) 395.03,4102.36 390.19,4107.2 390.19,4188.48 467.17,4265.46 473.76,4265.46 538.87,4330.57 538.87,4358.54 v1(499.03,4398.38)
SDA: IC2.27 IC5.3 R20.1 | length 224.2
  Top w6: IC5.3 460.63,4264.96 R20.1 463.78,4261.02 443.19,4240.43 443.19,4160.57 455.99,4147.77 467.96,4147.77 481.88,4133.86 IC2.27
Tx: IC2.31 TP3.1 | length 601.6
  Top w6: v1(468.36,3994.2) 468.36,4041.61 481.87,4055.12 IC2.31
  Bot w6: v1(468.36,3994.2) 469.4,3993.16 469.4,3975.36 595.23,3849.54 849.53,3849.54 TP3.1
UMEAS1: J1.3 R15.1 RL1.11 | length 112.3
  Top w6: RL1.11 55.56,3850.35 137.84,3850.35 R15.1
UMEAS2: J1.1 R17.1 | length 243.9
  Top w30: R17.1 -482.62,3532.46 -482.62,3459.57 -428.85,3405.8 -428.85,3333.57 J1.1
pads on no net: IC2.2 IC2.3 IC2.6 IC2.7 IC2.8 IC2.9 IC2.12 IC2.19 IC2.22 IC2.24 IC2.25 IC2.32 IC4.5 IC4.6 IC4.7 IC6.5 IC7.3 IC7.4 IC7.5 IC7.6 IC7.7 IC7.11 IC7.12 IC7.15

## Keep-outs
KeepOutLayer:
  lines w7.87: -551.18,3090.55 944.88,3090.55 944.88,4084.65 531.5,4498.03 -147.64,4498.03 -551.18,4094.49 -551.18,3090.55
  lines w39.37: -520,3600 -450,3600 -433.07,3583.07 -433.07,3504.57 ; -510,3400 -510,3281.3 -478.7,3250 210,3250 240,3280 240,3390 130,3500 130,3710 220,3800 220,4080 ; -330,3510 -330,3580 -270,3640 -139.53,3640 -30,3749.53 -30,3890 0,3920 90,3920 120,3890 220,3890

## Silkscreen, mask and mechanical layers (free items; w line width, h text height)
TopOverlay:
  text "MEAS" at -520,3110 h47.24
  text "COM" at -100,3100 h47.24
  text "P" at 360,3100 h47.24
  text "H" at 460,3100 h47.24
  text "L" at 580,3100 h47.24
  text "G" at 670,3100 h47.24
BottomOverlay:
  text "GND" at 825,3975 h60
  text "Tx" at 825,3875 h60
  text "Rx" at 825,3775 h60
  text "Vcc" at 825,3675 h60
Mechanical1:
  the board outline again, w3.94

## Text inside footprints (layer, text, board x,y; h text height)
J1: TopOverlay "1" at -430.12,3091.73 h47.24; Mechanical14 "1" at -497.05,3390.94 h47.24
J3: TopOverlay "4" at 695,3350 h39.37; TopOverlay "1" at 405,3350 h39.37; TopOverlay "2" at 495,3350 h39.37; TopOverlay "3" at 595,3350 h39.37